# EAGLE board gate_board v4 (EAGLE 9.7.0)
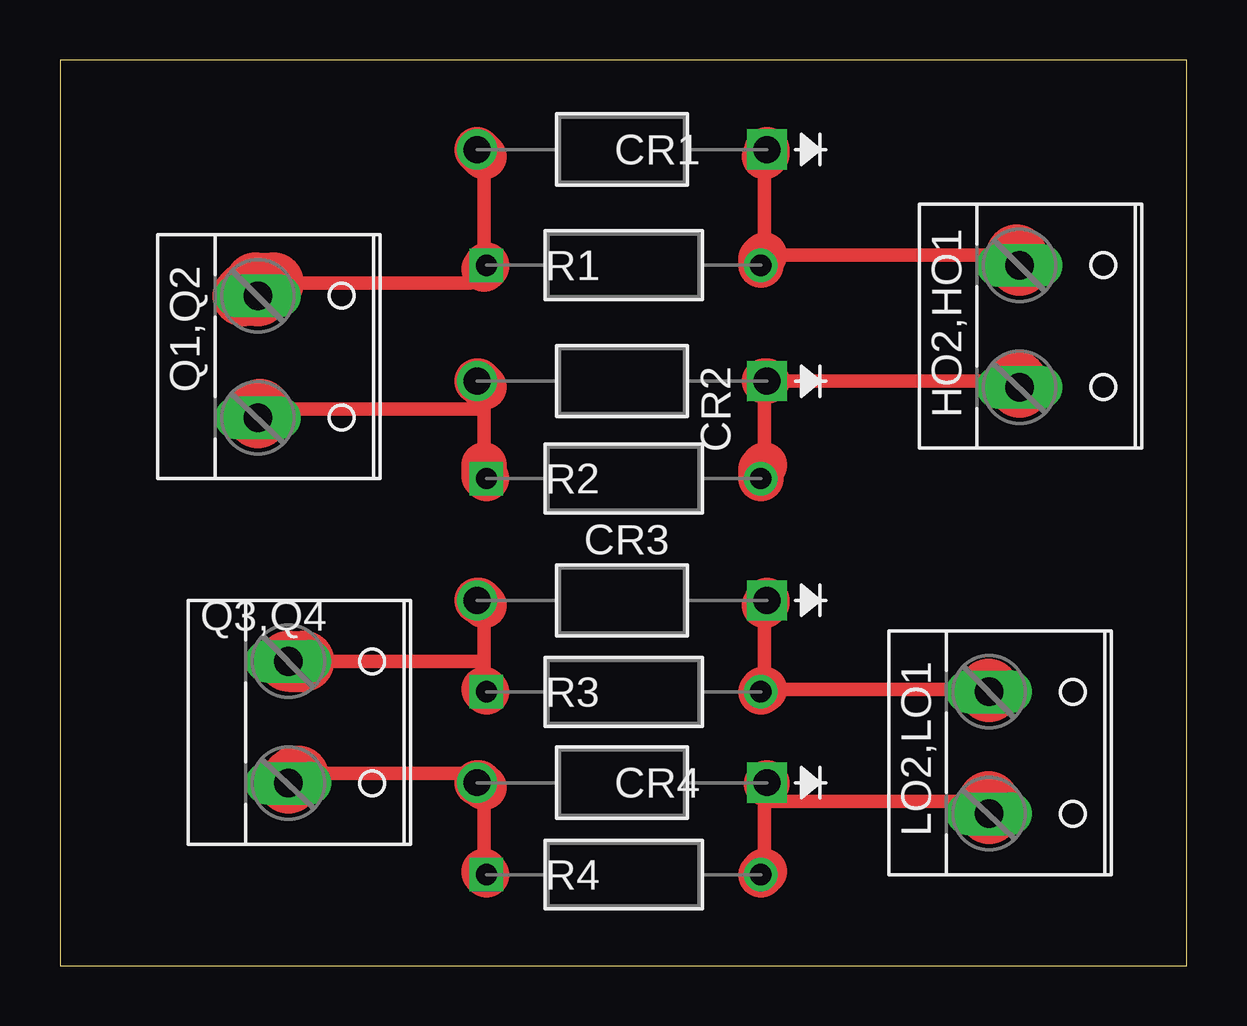
[diagram p0: board, top side]

Size 46.97 x 37.77 mm. Coordinates in mm from the lower left corner, seen from the top.
Outline: 0,0 46.97,0 46.97,37.77 0,37.77 0,0
Copper layers (1*16): Top 0.035mm / dielectric 1.5mm / Bottom 0.035mm
Design rules "Fusion Electronics Design Rules": minimum track width 22mil, minimum drill 0.35mm, track to track 24mil, track to pad 24mil, pad to pad 6mil, via to via 6mil, smd to smd 6mil, copper to edge 40mil, drill to drill 6mil, minimum pad ring 10mil, minimum via ring 8mil, stop-mask expansion 4mil, vias tented up to drill 9999mil, thermal gap 10mil

## Footprints (pad centres in the part's own frame; a part is rotated, then mirrored left to right if it is on the bottom)
CR_1N4005_ONS = drill 1.118 pad 1.626 square: 1 0,0 | drill 1.118 pad 1.626: 2 12.08,0
W237-132 = drill 1.194 long: 1 -2.54,-0.635; 2 2.54,-0.635
STA_CF14_STP = drill 0.889 pad 1.397 square: 1 0,0 | drill 0.889 pad 1.397: 2 11.43,0

## Placement (x,y rotation side)
CR1  1N4007CR_1N4005_ONS  [CR_1N4005_ONS]  29.46,34.04 180 top
CR2  1N4007CR_1N4005_ONS  [CR_1N4005_ONS]  29.46,24.38 180 top
CR3  1N4007CR_1N4005_ONS  [CR_1N4005_ONS]  29.46,15.24 180 top
CR4  1N4007CR_1N4005_ONS  [CR_1N4005_ONS]  29.46,7.64 180 top
HO2,HO1  [W237-132]  40.64,26.67 270 top
LO2,LO1  [W237-132]  39.37,8.89 270 top
Q1,Q2  [W237-132]  8.89,25.4 270 top
Q3,Q4  [W237-132]  10.16,10.16 270 top
R1  CF14JT10K0STA_CF14_STP  [STA_CF14_STP]  17.78,29.21 0 top
R2  CF14JT10K0STA_CF14_STP  [STA_CF14_STP]  17.78,20.32 0 top
R3  CF14JT10K0STA_CF14_STP  [STA_CF14_STP]  17.78,11.43 0 top
R4  CF14JT10K0STA_CF14_STP  [STA_CF14_STP]  17.78,3.81 0 top

## Library data of the parts
CR1-CR4 = 2024-12-05_04-23-24_Library; COPYRIGHT: Copyright (C) 2024 Ultra Librarian. All rights reserved.; MANUFACTURER_PART_NUMBER: 1N4007; MFR_NAME: onsemi
HO2,HO1 LO2,LO1 Q1,Q2 Q3,Q4 = con-wago-508
R1-R4 = 2024-12-04_14-13-54_Library; COPYRIGHT: Copyright (C) 2024 Ultra Librarian. All rights reserved.; MANUFACTURER_PART_NUMBER: CF14JT10K0; MFR_NAME: Stackpole International

## Nets
N$1: CR1.2 Q1,Q2.1 R1.1
N$2: CR1.1 HO2,HO1.1 R1.2
N$3: CR2.2 Q1,Q2.2 R2.1
N$4: CR2.1 HO2,HO1.2 R2.2
N$5: CR3.2 Q3,Q4.1 R3.1
N$6: CR3.1 LO2,LO1.1 R3.2
N$7: CR4.2 Q3,Q4.2 R4.1
N$8: CR4.1 LO2,LO1.2 R4.2

## Tracks (layer width: path | path; a pad name or v marks a point on that pad's centre or on a via)
N$1
  Top 0.559: 17.68,33.73 17.68,29.64 R1.1 | 8.89,28.47 17.09,28.47 17.68,29.06
  Top 1.905: R1.1 17.78,29.16 17.68,29.06 | CR1.2 17.38,34.03 17.68,33.73
  Top 2.54: Q1,Q2.1 7.62,27.94 8.15,28.47 8.89,28.47
N$2
  Top 0.559: 29.36,33.73 29.36,29.64 39.88,29.64
  Top 1.905: CR1.1 29.46,33.83 29.36,33.73 | R1.2 29.21,29.49 29.36,29.64
  Top 2.54: HO2,HO1.1 39.88,29.34 39.88,29.64
N$3
  Top 0.559: 17.68,24.13 17.68,23.22 | 17.68,23.22 17.68,20.88 | 17.68,23.22 8.33,23.22
  Top 1.905: CR2.2 17.42,24.38 17.68,24.13 | R2.1 17.68,20.42 17.68,20.88
  Top 2.54: Q1,Q2.2 8.33,22.94 8.33,23.22
N$4
  Top 0.559: 29.36,24.38 29.36,20.88 | CR2.1 39.88,24.38
  Top 1.905: CR2.1 29.36,24.38 | R2.2 29.21,20.73 29.36,20.88
  Top 2.54: HO2,HO1.2 39.88,24.26 39.88,24.38
N$5
  Top 0.559: 17.68,15.04 17.68,12.7 | 17.68,12.7 17.68,11.53 | 10.16,12.7 17.68,12.7
  Top 1.905: CR3.2 17.48,15.24 17.68,15.04 | R3.1 17.68,11.53
  Top 2.54: Q3,Q4.1 10.16,12.7
N$6
  Top 0.559: 29.36,15.04 29.36,11.53 38.71,11.53
  Top 1.905: CR3.1 29.46,15.14 29.36,15.04 | R3.2 29.31,11.53 29.36,11.53
  Top 2.54: LO2,LO1.1 38.71,11.45 38.71,11.53
N$7
  Top 0.559: 17.68,7.44 17.68,3.94 | 9.94,7.92 10.08,8.03 17.09,8.03 CR4.2
  Top 1.905: CR4.2 17.48,7.64 17.68,7.44 | R4.1 17.68,3.91 17.68,3.94
  Top 2.54: Q3,Q4.2 9.83,7.92 9.94,7.92
N$8
  Top 0.559: 29.36,6.86 29.36,7.44 CR4.1 | 29.36,6.86 29.36,3.94 | 29.36,6.86 38.71,6.86 | 29.46,7.59 29.36,6.86
  Top 1.905: CR4.1 29.46,7.59 | R4.2 29.34,3.94 29.36,3.94
  Top 2.54: LO2,LO1.2 38.71,6.38 38.71,6.86